# Altium PCB PowerBoard.PcbDoc (part 2 of 2)
Units mm, origin at the board's own origin, x right, y up, seen from the top; angles counter-clockwise.
Board outline 45 x 35 mm, 8 copper layers (Top Layer, Int1 (PGND), int2 (PWR_MOT), int3 (ALIM_MOT), int4 (+3.3VD), int5 (+3.3VA), Int6 (GNDA), Bottom Layer), stack 1.733 mm thick; 96 components, 64 nets, 341 pads, 448 vias.
Unrouted connection lines stored in the file: 117.
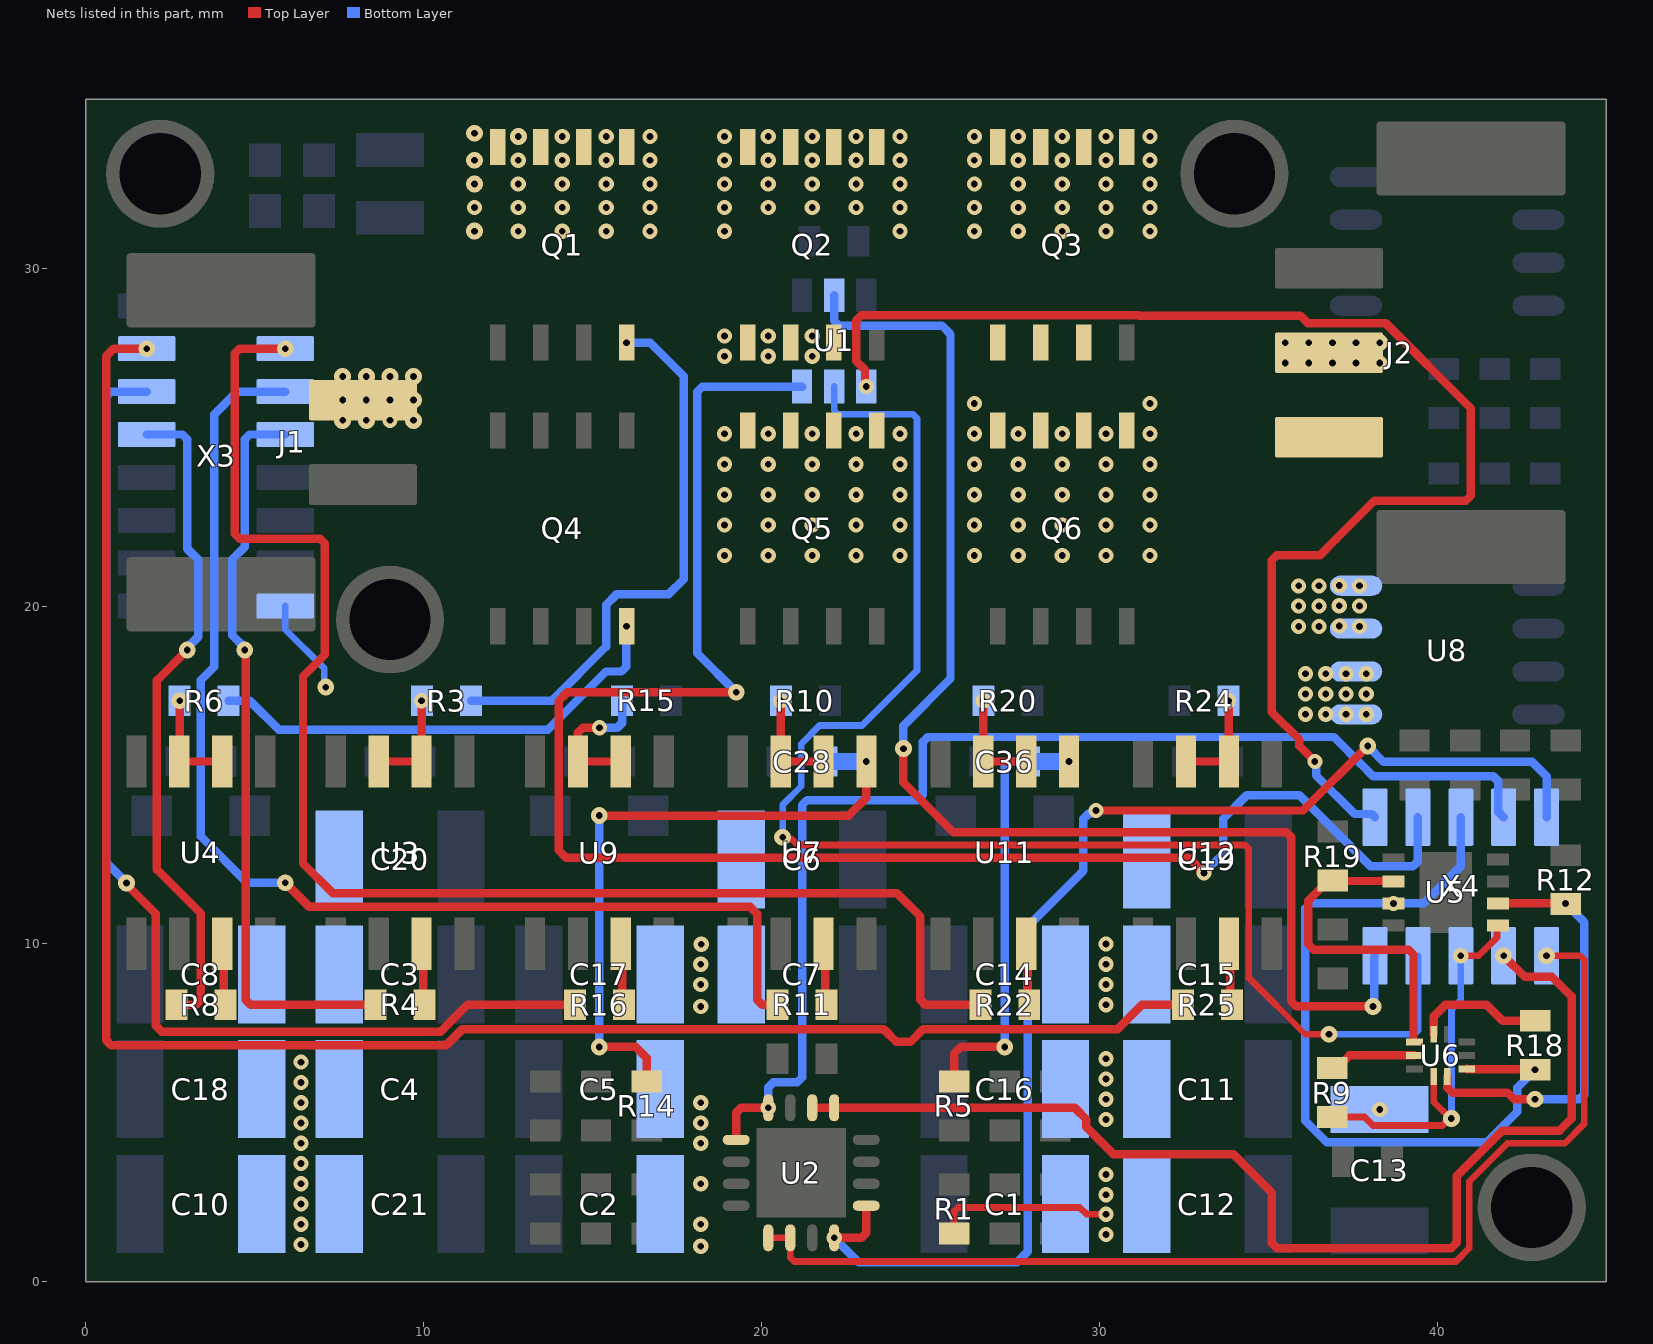
[diagram p8: the nets of this part, all layers, seen from the top]

## Via types
v1: diameter 0.45, hole 0.2, Top Layer to Bottom Layer, 368 vias
v2: diameter 0.5, hole 0.2, Top Layer to Bottom Layer, 80 vias

## Nets (pads, with @x,y where several pads share a name; then routed paths per layer and width w, separated by ;. In a path a pad name is that pad's centre, name@x,y a point inside that pad or via, vN(x,y) a via of type N, cw(c..) or ccw(c..) an arc to the next point about the centre after c; other vN are vias at no path point) (continued)
NetJ2_2: J2.2 U8.3 U8.4
  other v1: 35.9,19.4 36.5,19.4 37.7,19.4 37.1,19.409 35.9,20 36.5,20 37.1,20.009 37.7,20 35.9,20.6 36.5,20.6 37.1,20.609 37.7,20.6 36.2,27.2 38.3,27.2 35.5,27.8
  other v2: 35.5,27.2 36.9,27.2 37.6,27.2 36.2,27.8 36.9,27.8 37.6,27.8 38.3,27.8
NetQ1_4: Q1.4 R3.2 | length 16.6
  Bottom Layer w0.25: R3.2@11.4,17.2 13.8,17.2 15.4,18.8 15.4,20.037 15.713,20.35 17.25,20.35 17.7,20.8 17.7,26.8 16.7,27.8 v1(16,27.8)
NetQ4_4: Q4.4 R6.2 | length 14.1
  Bottom Layer w0.25: R6.2@4.225,17.2 4.85,17.2 5.707,16.343 13.678,16.343 15.4,18.065 15.854,18.065 16,18.211 v1(16,19.404)
NetR3_1: R3.1 U3.6 U3.7 | length 3.7
  Top Layer w0.25: U3.7@8.665,15.875 U3.7@8.665,15.4 U3.6@9.935,15.4 v1(9.935,17.2) 9.897,17.162 v1@9.897,17.107
NetR4_1: R4.1 X3.9 | length 22.1
  Top Layer w0.25: v2(4.7,18.7) 4.725,18.675 4.725,8.346 4.871,8.2 R4.1@8.575,8.2
  Bottom Layer w0.25: v2(4.7,18.7) 4.7,18.768 4.325,19.143 4.325,21.375 4.7,21.75 4.7,24.934 4.846,25.08 X3.9@5.9,25.08
NetR4_2: R4.2 U3.3 | length 1.8
  Top Layer w0.25: U3.3@9.935,10 9.98,9.955 9.98,8.245 R4.2@10.025,8.2
NetR6_1: R6.1 U4.6 U4.7 | length 3.1
  Top Layer w0.25: U4.7@2.765,15.4 U4.6@4.035,15.4 ; U4.7@2.775,15.41 v2(2.775,17.2)
  Top Layer w0.5: U4.7@2.765,15.4 U4.7@2.775,15.41
NetR8_1: R8.1 X3.10 | length 19.8
  Top Layer w0.25: R8.1@2.675,8.2 3.254,8.2 3.4,8.346 3.4,10.9 2.1,12.2 2.1,17.8 v2(3,18.7)
  Bottom Layer w0.25: X3.10@1.8,25.08 2.854,25.08 3,24.934 3,21.7 3.325,21.375 3.325,19.093 3,18.768 v2(3,18.7)
NetR8_2: R8.2 U4.3 | length 1.8
  Top Layer w0.25: U4.3@4.035,10 4.08,9.955 4.08,8.245 R8.2@4.125,8.2
NetR9_1: R9.1 U6.9 | length 2.6
  Top Layer w0.25: R9.1@36.9,6.325 37.025,6.325 37.4,6.7 U6.9@39.325,6.7
NetR9_2: R9.2 U5.1 U6.1 X4.6 | length 11.8
  Top Layer w0.2: R9.2@36.9,4.875 37.853,4.875 38.103,4.625 40.153,4.625 40.356,4.828 v2@40.391,4.828 ; U6.1@39.9,6.075 39.9,5.319 v2@40.391,4.828 ; v2(40.42,4.828) v2@40.391,4.828 ; v1(40.7,9.65) 41.227,9.65 41.769,10.192 41.769,10.513 U5.1@41.806,10.55
  Bottom Layer w0.2: v2(40.42,4.828) 40.425,4.833 40.425,8.064 40.7,8.339 v1(40.7,9.65)
NetR10_1: R10.1 U7.6 U7.7 | length 3.1
  Top Layer w0.25: v1(20.565,17.2) U7.7@20.565,15.4 U7.6@21.835,15.4
NetR11_1: R11.1 X3.11 | length 35.7
  Top Layer w0.25: v2(5.9,11.811) 6.611,11.1 19.659,11.1 19.87,10.889 19.87,8.346 20.016,8.2 R11.1@20.475,8.2
  Bottom Layer w0.25: v2(5.9,11.811) 4.769,11.811 3.4,13.18 3.4,17.811 3.8,18.211 3.8,25.679 4.471,26.35 X3.11@5.9,26.35
NetR11_2: R11.2 U7.3 | length 1.8
  Top Layer w0.25: U7.3@21.835,10 21.88,9.955 21.88,8.245 R11.2@21.925,8.2
NetR12_2: R12.2 U5.2 U6.2 | length 12.5
  Top Layer w0.25: U6.2@40.3,6.075 40.3,5.746 40.446,5.6 42.08,5.6 42.275,5.405 42.895,5.405 v2(42.9,5.4) ; U5.2@41.806,11.2 R12.2@43.781,11.2 ; v2(43.8,11.2) 43.8,11.181 R12.2@43.806,11.175
  Bottom Layer w0.25: v2(42.9,5.4) 44.207,5.4 44.354,5.546 44.354,10.646 v2(43.8,11.2)
NetR15_1: R15.1 U9.6 U9.7 | length 4.2
  Top Layer w0.25: v1(15.2,16.4) 14.711,16.4 14.565,16.254 U9.7@14.565,15.4 U9.6@15.835,15.4
  Bottom Layer w0.25: v1(15.2,16.4) 15.729,16.4 15.875,16.546 R15.1@15.875,17.2
NetR16_1: R16.1 X3.12 | length 33.3
  Top Layer w0.25: v2(1.2,11.8) 1.2,11.759 2.07,10.889 2.07,7.576 2.246,7.4 10.5,7.4 11.3,8.2 R16.1@14.475,8.2
  Bottom Layer w0.25: v2(1.2,11.8) 1.2,11.811 0.6,12.411 0.6,26.204 0.746,26.35 X3.12@1.8,26.35
NetR16_2: R16.2 U9.3 | length 1.8
  Top Layer w0.25: U9.3@15.835,10 15.88,9.955 15.88,8.245 R16.2@15.925,8.2
NetR18_1: R18.1 U6.7 | length 3.9
  Top Layer w0.25: U6.7@39.9,7.325 39.9,7.854 40.246,8.2 41.459,8.2 41.934,7.725 R18.1@42.9,7.725
NetR18_2: R18.2 U5.7 U6.3 X4.5 | length 23.3
  Top Layer w0.25: U6.3@40.875,6.3 40.887,6.287 42.887,6.287 v1(42.9,6.275)
  Bottom Layer w0.25: X4.5@40.7,13.75 40.7,12.3 39.6,11.2 v1(38.706,11.2) 36.246,11.2 36.1,11.054 36.1,4.761 36.736,4.125 41.466,4.125 42.375,5.034 42.375,5.75 v1(42.9,6.275)
NetR19_2: R19.2 U5.6 U6.8 | length 9.9
  Top Layer w0.25: U5.6@38.706,11.85 38.693,11.863 36.918,11.863 R19.2@36.906,11.875 36.781,11.875 36.181,11.275 36.181,9.993 36.342,9.832 39.154,9.832 39.3,9.686 U6.8@39.3,7.125
NetR20_1: R20.1 U11.6 U11.7 | length 3.1
  Top Layer w0.25: v1(26.565,17.2) U11.7@26.565,15.4 U11.6@27.835,15.4
NetR22_1: R22.1 X3.13 | length 42.6
  Top Layer w0.25: v2(5.9,27.62) 4.546,27.62 4.4,27.474 4.4,22.146 4.546,22 6.929,22 7.075,21.854 7.075,18.565 6.425,17.915 6.425,12.386 7.311,11.5 24.007,11.5 24.7,10.807 24.7,8.593 24.7,8.346 24.846,8.2 R22.1@26.475,8.2
NetR22_2: R22.2 U11.3 | length 1.8
  Top Layer w0.25: U11.3@27.835,10 27.88,9.955 27.88,8.245 R22.2@27.925,8.2
NetR24_1: R24.1 U12.6 U12.7 | length 3.1
  Top Layer w0.25: U12.7@32.565,15.4 U12.6@33.835,15.4 33.83,15.405 33.83,17.195 v1(33.825,17.2)
NetR25_1: R25.1 X3.14 | length 54.3
  Top Layer w0.25: v2(1.8,27.62) 0.82,27.62 0.6,27.4 0.6,7.146 0.746,7 10.666,7 11.141,7.475 23.618,7.475 23.993,7.1 24.407,7.1 24.782,7.475 30.538,7.475 31.263,8.2 R25.1@32.475,8.2
NetR25_2: R25.2 U12.3 | length 1.8
  Top Layer w0.25: U12.3@33.835,10 33.88,9.955 33.88,8.245 R25.2@33.925,8.2
NetU1_2: U1.2 X4.10 | length 39.2
  Top Layer w0.25: v2(24.2,15.781) 24.2,14.782 25.682,13.3 31.502,13.3 31.506,13.303 35.534,13.303 35.68,13.157 35.68,8.296 35.826,8.15 v2(38.103,8.15)
  Bottom Layer w0.25: U1.2@22.15,29.2 22.15,28.451 22.296,28.304 25.339,28.304 25.593,28.05 25.593,17.853 24.2,16.46 v2(24.2,15.781) ; v2(38.103,8.15) 38.132,8.178 38.132,9.622 X4.10@38.16,9.65
NetU1_4: U1.4 X4.9 | length 39.9
  Top Layer w0.25: v1(23.1,26.5) 23.062,26.538 23.062,26.997 22.8,27.258 22.8,28.454 22.959,28.613 31.148,28.613 31.16,28.6 35.952,28.6 36.177,28.375 38.479,28.375 41,25.854 41,23.271 40.854,23.125 38.151,23.125 37.01,21.985 36.526,21.5 35.246,21.5 35.1,21.354 35.1,16.869 35.921,16.048 35.921,15.859 v1(36.38,15.4)
  Bottom Layer w0.25: v1(36.38,15.4) 36.419,15.362 36.419,14.989 37.561,13.846 38.064,13.846 X4.9@38.16,13.75
NetU1_5: U1.5 X4.8 | length 43.8
  Top Layer w0.2: v2(20.625,13.157) 20.682,13.1 20.907,13.1 21.082,12.925 31.658,12.925 31.661,12.928 34.308,12.928 34.425,12.811 34.425,8.995 36.095,7.325 v2(36.8,7.325)
  Bottom Layer w0.2: v2(20.625,13.157) 20.625,14.118 21.175,14.668 21.175,15.923 21.716,16.464 22.975,16.464 24.6,18.089 24.6,25.561 24.483,25.679 22.267,25.679 22.15,25.796 U1.5@22.15,26.5 ; v2(36.8,7.325) 39.313,7.325 39.43,7.442 X4.8@39.43,9.65
NetU1_6: U1.6 X4.7 | length 51.8
  Top Layer w0.25: v2(19.25,17.45) 14.246,17.45 13.99,17.194 13.99,12.775 14.215,12.55 32.65,12.55 v1(33.1,12.1)
  Bottom Layer w0.25: v2(19.25,17.45) 18.101,18.599 18.101,26.354 18.248,26.5 U1.6@21.2,26.5 ; v1(33.1,12.1) 33.662,12.662 33.662,13.701 34.363,14.401 35.921,14.401 38.023,12.3 39.284,12.3 39.43,12.446 X4.7@39.43,13.75
NetU2_1: U2.1 U2.16 X4.1 | length 37.7
  Top Layer w0.25: v1(22.15,1.3) 22.954,1.3 23.1,1.446 U2.1@23.1,2.25 ; v1(29.9,13.95) 36.033,13.95 v2(37.944,15.862)
  Bottom Layer w0.25: v1(22.15,1.3) 22.875,0.575 27.562,0.575 27.88,0.893 27.88,10.519 29.525,12.164 29.525,13.704 29.671,13.85 29.746,13.85 29.846,13.95 v1(29.9,13.95) ; v2(37.944,15.862) 38.417,15.388 42.815,15.388 43.24,14.963 X4.1@43.24,13.75
NetU2_5: U2.5 U2.6 X4.4 | length 34.1
  Top Layer w0.25: U2.6@21.5,5.15 U2.5@22.15,5.15 29.271,5.15 29.618,4.804 29.618,4.571 30.414,3.775 33.967,3.775 35.105,2.637 35.105,1.143 35.251,0.996 40.42,0.996 40.575,1.152 40.575,3.122 41.928,4.475 43.625,4.475 43.979,4.828 43.979,8.446 43.401,9.024 42.596,9.024 v2(41.97,9.65)
NetU2_8: U2.8 U2.9 X4.3 | length 35.6
  Top Layer w0.25: U2.9@19.25,4.2 19.25,5.004 19.396,5.15 v1(20.2,5.15)
  Bottom Layer w0.25: v1(20.2,5.15) 20.2,5.754 20.346,5.9 21.054,5.9 21.2,6.046 21.2,14.109 21.346,14.255 24.616,14.255 24.775,14.414 24.775,15.979 24.921,16.125 26.856,16.125 36.942,16.125 37.419,15.648 37.419,15.644 37.727,15.337 37.731,15.337 38.104,14.963 41.662,14.963 41.808,14.817 41.808,13.912 X4.3@41.97,13.75
NetU2_13: U2.13 U2.14 X4.2 | length 33.6
  Top Layer w0.2: U2.13@20.2,1.3 U2.14@20.85,1.3 20.85,0.717 20.967,0.6 40.554,0.6 40.95,0.996 40.95,2.966 42.084,4.1 43.781,4.1 44.354,4.673 44.354,9.533 44.236,9.65 v2(43.24,9.65)
"Phase V": C28.1 Q2.1 Q2.2 Q2.3 Q5.5 Q5.6 Q5.7 Q5.8 R14.1 U7.5 U8.1 U8.2 | length 19.5
  Top Layer w0.25: v2(15.196,6.95) 16.275,6.95 16.6,6.625 R14.1@16.6,5.875 ; v2(15.196,13.8) 22.575,13.8 23.1,14.325 v1(23.1,15.4)
  Bottom Layer w0.25: v2(15.196,6.95) v2(15.196,13.8)
  Bottom Layer w0.5: C28.1@21.925,15.4 v1(23.1,15.4)
  other v1: 36.1,16.8 36.7,16.8 37.3,16.8 37.9,16.8 36.1,17.4 36.7,17.4 37.3,17.4 37.9,17.4 36.1,18 36.7,18 37.3,18 37.9,18 18.9,21.5 20.2,21.5 21.5,21.5 22.8,21.5 24.1,21.5 18.9,22.4 20.2,22.4 21.5,22.4 22.8,22.4 24.1,22.4 18.9,23.3 20.2,23.3 21.5,23.3 22.8,23.3 24.1,23.3 18.9,24.2 20.2,24.2 21.5,24.2 22.8,24.2 24.1,24.2 18.9,25.1 20.2,25.1 21.5,25.1 22.8,25.1 24.1,25.1 18.9,27.4 20.2,27.4 21.5,27.4 18.9,28 20.2,28 21.5,28
"Phase W": C36.1 J2.3 Q3.1 Q3.2 Q3.3 Q6.5 Q6.6 Q6.7 Q6.8 R5.1 U11.5 | length 13.6
  Top Layer w0.25: R5.1@25.7,6.025 25.7,6.754 25.896,6.95 v2(27.2,6.95)
  Top Layer w0.5: J2.3@35.8,25 J2.3@36.8,25
  Bottom Layer w0.25: v2(27.2,6.95) 27.2,15.254 27.346,15.4 C36.1@27.925,15.4
  Bottom Layer w0.5: C36.1@27.925,15.4 v1(29.1,15.4)
  other v1: 26.3,21.5 27.6,21.5 28.9,21.5 30.2,21.5 31.5,21.5 26.3,22.4 27.6,22.4 28.9,22.4 30.2,22.4 31.5,22.4 26.3,23.3 27.6,23.3 28.9,23.3 30.2,23.3 31.5,23.3 26.3,24.2 27.6,24.2 28.9,24.2 30.2,24.2 31.5,24.2 26.3,25.1 27.6,25.1 28.9,25.1 30.2,25.1 31.5,25.1 26.3,26 31.5,26
VP: C1.2 C2.2 C3.2 C4.2 C5.2 C6.2 C7.2 C8.2 C10.2 C11.2 C12.2 C13.2 C14.2 C15.2 C16.2 C17.2 C18.2 C19.2 C20.2 C21.2 J1.2 Q1.5 Q1.6 Q1.7 Q1.8 Q2.5 Q2.6 Q2.7 Q2.8 Q3.5 Q3.6 Q3.7 Q3.8 R1.1 X3.1 | length 8.1
  Top Layer w0.2: R1.1@25.7,1.475 25.7,2.083 25.817,2.2 29.418,2.2 29.618,2 v1(30.2,2)
  Bottom Layer w0.2: X3.1@5.9,20 5.9,19.306 7.056,18.15 7.056,17.644 v2(7.1,17.6)
  other v1: 18.2,1.05 6.362,1.1 30.2,1.4 6.362,1.7 18.2,1.7 6.362,2.3 30.2,2.575 6.362,2.9 18.2,2.9 30.2,3.175 6.362,3.5 6.362,4.1 18.2,4.1 6.362,4.7 18.2,4.7 30.2,4.8 38.3,5.1 6.362,5.3 18.2,5.3 30.2,5.4 6.362,5.9 30.2,6 6.362,6.5 30.2,6.6 18.2,8.15 30.2,8.2 18.2,8.8 30.2,8.8 18.2,9.4 30.2,9.4 18.212,9.992 30.2,10 9,25.5 8.3,26.1 12.8,31.1 14.1,31.1 15.4,31.1 16.7,31.1 18.9,31.1 24.1,31.1 26.3,31.1 27.6,31.1 28.9,31.1 30.2,31.1 31.5,31.1 11.5,31.8 12.8,31.8 14.1,31.8 15.4,31.8 16.7,31.8 18.9,31.8 20.2,31.8 21.5,31.8 22.8,31.8 24.1,31.8 26.3,31.8 27.6,31.8 28.9,31.8 30.2,31.8 31.5,31.8 12.8,32.5 14.1,32.5 15.4,32.5 16.7,32.5 18.9,32.5 20.2,32.5 21.5,32.5 22.8,32.5 24.1,32.5 26.3,32.5 27.6,32.5 28.9,32.5 30.2,32.5 31.5,32.5 12.8,33.2 14.1,33.2 15.4,33.2 16.7,33.2 18.9,33.2 20.2,33.2 21.5,33.2 22.8,33.2 24.1,33.2 26.3,33.2 27.6,33.2 28.9,33.2 30.2,33.2 31.5,33.2 14.1,33.9 15.4,33.9 16.7,33.9 18.9,33.9 20.2,33.9 21.5,33.9 22.8,33.9 24.1,33.9 26.3,33.9 27.6,33.9 28.9,33.9 30.2,33.9 31.5,33.9
  other v2: 7.6,25.5 8.3,25.5 9.7,25.5 7.6,26.1 9,26.1 9.7,26.1 7.6,26.8 8.3,26.8 9,26.8 9.7,26.8 11.5,31.1 11.5,32.5 11.5,33.2 12.8,33.9 11.5,34
pads on no net: J1.4 J1.5 J2.4 J2.5 U2.7 U2.15 U3.1 U3.4 U4.1 U4.4 U5.9 U7.1 U7.4 U9.1 U9.4 U11.1 U11.4 U12.1 U12.4 X3.16

## Polygon pours and split planes (outlines as drawn)
DGND on Top Layer "DGND_L01_P014" (solid, pour order 14): 18.513,20.429 22.609,20.429 22.609,18.479 18.513,18.479
DGND on Top Layer "DGND_L01_P015" (solid, pour order 15): 25.8,20.35 29.9,20.35 29.9,18.4 25.8,18.4
DGND on Top Layer "DGND_L01_P013" (solid, pour order 13): 11.075,20.35 15.196,20.35 15.196,18.4 11.075,18.4
VP on Top Layer "VP_L01_P006" (solid, pour order 6): 13,34.5 32,34.5 32,29 13,29
"Phase V" on Top Layer "PHASE_V_L01_P003" (solid, pour order 3): 22.5,28.575 22.5,26 24.7,26 24.7,20.775 18.5,20.775 18.5,28.575
NetC24_1 on Top Layer "NETC24_1_L01_P002" (solid, pour order 2): 15.475,28.575 15.475,26.775 17.275,26.775 17.275,20.775 11.075,20.775 11.075,28.575
"Phase W" on Top Layer "PHASE_W_L01_P000" (solid, pour order 0): 38.65,26.2 38.65,23.6 32,23.6 32,20.8 25.8,20.8 25.8,28.6 30.2,28.6 30.2,26.2
AGND on Bottom Layer "AGND_L08_P029" (solid, pour order 29): 41.1,26 43.8,26 43.8,23.5 41.1,23.5
DGND on Bottom Layer "DGND_L08_P027" (solid, pour order 27): 40.8,26 40.8,23.5 39.6,23.5 39.6,26
VP on Bottom Layer "VP_L08_P018" (solid, pour order 18): 18.5,14.2 18.5,10.831 16.125,10.831 16.125,10.8 16.125,0.623 16.148,0.6 18.6,0.6 18.6,7.4 20.2,7.4 20.2,10.8 20.169,10.831 20.169,14.2
DGND on Bottom Layer "DGND_L08_P020" (solid, pour order 20): 26.238,6.625 27.8,6.625 27.8,5.425 26.238,5.425 26.238,2.2 27.8,2.2 27.8,0.623 23.793,0.623 23.793,7.4 22.163,7.4 22.163,14.194 24.6,14.201 24.6,10.8 26.238,10.8
DGND on Bottom Layer "DGND_L08_P022" (solid, pour order 22): 36,0.623 36.023,0.6 36.588,0.6 36.588,0.623 39.9,0.623 39.9,3 36,3 36,14.2 33.4,14.2 33.4,0.623
NetJ2_2 on Bottom Layer "NETJ2_2_L08_P025" (solid, pour order 25): 38.5,21.1 35.1,21.1 35.1,18.9 38.5,18.9
"Phase V" on Bottom Layer "PHASE_V_L08_P024" (solid, pour order 24): 38.5,18.5 35.7,18.5 35.7,16.4 38.5,16.4
VP on Bottom Layer "VP_L08_P021" (solid, pour order 21): 32.3,14.2 30.162,14.2 30.162,10.8 28.125,10.8 28.125,0.6 32.3,0.6
DGND on Bottom Layer "DGND_L08_P019" (solid, pour order 19): 10.225,14.2 12.262,14.2 12.262,10.8 14.3,10.8 14.3,0.6 10.225,0.6
DGND on Bottom Layer "DGND_L08_P017" (solid, pour order 17): 3.177,0.6 3.2,0.623 3.2,6.9 2.5,6.9 2.5,10.8 0.7,10.8 0.7,0.6
VP on Bottom Layer "VP_L08_P016" (solid, pour order 16): 8.4,10.8 8.3,10.9 8.3,14.2 6.362,14.2 6.362,10.8 4.325,10.8 4.325,0.6 8.4,0.6
NetC24_1 on Bottom Layer "NETC24_1_L08_P012" (solid, pour order 12): 35.8,31 38.8,31 38.8,31.9 38,31.9 38,33.4 36.64,33.4 35.8,32.014
NetJ2_1 on Bottom Layer "NETJ2_1_L08_P011" (solid, pour order 11): 36.4,28.4 38.8,28.4 38.8,30.8 36.4,30.8 36.4,29.2
no net on int3 (ALIM_MOT) (split plane): 38.671,28.53 36.529,28.53 36.529,30.471 38.671,30.471
"Phase W" on int3 (ALIM_MOT) (split plane): 31.87,20.729 25.83,20.729 25.83,26.571 31.87,26.571
DGND on int3 (ALIM_MOT) (split plane): 44.49,0.51 40.549,0.51 40.549,6.625 40.539,6.675 40.511,6.717 40.469,6.745 40.42,6.755 32.694,6.755 32.694,15.571 38.8,15.571 38.85,15.58 38.892,15.608 38.92,15.65 38.93,15.7 38.93,18.7 38.929,18.7 38.929,28.4 38.93,28.4 38.93,30.6 38.93,33.4 38.92,33.45 38.892,33.492 38.85,33.52 38.8,33.53 36.929,33.53 36.929,34.49 44.49,34.49
NetJ2_2 on int3 (ALIM_MOT) (split plane): 38.671,18.83 34.929,18.83 34.929,28.271 38.671,28.271
"Phase V" on int3 (ALIM_MOT) (split plane): 34.67,28.346 34.67,21.2 34.67,18.7 34.68,18.65 34.708,18.608 34.75,18.58 34.8,18.571 38.671,18.571 38.671,15.83 32.129,15.83 32.129,26.7 32.12,26.75 32.092,26.792 32.05,26.82 32,26.829 25.7,26.829 25.65,26.82 25.608,26.792 25.58,26.75 25.571,26.7 25.571,20.729 17.929,20.729 17.929,28.471 34.546,28.471
NetC24_1 on int3 (ALIM_MOT) (split plane): 38.671,30.73 36.4,30.73 36.35,30.72 36.308,30.692 36.28,30.65 36.27,30.6 36.27,28.53 34.854,28.53 34.692,28.692 34.65,28.72 34.6,28.73 17.8,28.73 17.75,28.72 17.708,28.692 17.68,28.65 17.671,28.6 17.671,20.729 10.929,20.729 10.929,30.471 34,30.471 34.05,30.48 34.092,30.508 36.854,33.271 38.671,33.271
VP on int3 (ALIM_MOT) (split plane): 36.67,33.454 33.946,30.73 10.8,30.73 10.75,30.72 10.708,30.692 10.68,30.65 10.671,30.6 10.671,20.6 10.68,20.55 10.708,20.508 10.75,20.48 10.8,20.471 31.87,20.471 31.87,15.7 31.88,15.65 31.908,15.608 31.95,15.58 32,15.571 32.435,15.571 32.435,6.625 32.445,6.576 32.473,6.533 32.515,6.505 32.565,6.496 40.29,6.496 40.29,0.51 0.51,0.51 0.51,12.573 0.55,12.58 0.592,12.608 0.62,12.65 0.63,12.7 0.62,12.75 0.592,12.792 0.55,12.82 0.51,12.827 0.51,34.49 36.67,34.49
NetJ2_2 on int2 (PWR_MOT) (split plane): 38.671,26 38.671,23.4 38.671,20.7 38.671,18.83 34.929,18.83 34.929,28.271 38.671,28.271
NetJ2_1 on int2 (PWR_MOT) (split plane): 38.671,28.53 36.529,28.53 36.529,30.471 38.671,30.471
"Phase V" on int2 (PWR_MOT) (split plane): 34.67,28.346 34.67,18.7 34.68,18.65 34.708,18.608 34.75,18.58 34.8,18.571 38.671,18.571 38.671,15.83 32.63,15.829 32.63,20.6 32.63,26.7 32.62,26.75 32.592,26.792 32.55,26.82 32.5,26.829 25.8,26.829 25.75,26.82 25.708,26.792 25.68,26.75 25.671,26.7 25.671,20.6 25.671,16.929 23.6,16.929 23.55,16.92 23.508,16.892 23.48,16.85 23.471,16.8 23.471,14.529 22.629,14.529 22.629,17.871 24.5,17.871 24.55,17.88 24.592,17.908 24.62,17.95 24.629,18 24.629,20.6 24.62,20.65 24.592,20.692 24.55,20.72 24.5,20.729 18.53,20.729 18.53,28.471 34.546,28.471
"Phase W" on int2 (PWR_MOT) (split plane): 32.371,20.6 32.371,16.929 29.6,16.929 29.55,16.92 29.508,16.892 29.48,16.85 29.471,16.8 29.471,14.529 28.729,14.529 28.729,17.871 31.8,17.871 31.85,17.88 31.892,17.908 31.92,17.95 31.929,18 31.929,20.6 31.92,20.65 31.892,20.692 31.85,20.72 31.8,20.729 25.929,20.729 25.929,26.571 32.371,26.571
NetC24_1 on int2 (PWR_MOT) (split plane): 38.671,30.73 36.4,30.73 36.35,30.72 36.308,30.692 36.28,30.65 36.27,30.6 36.27,28.53 34.854,28.53 34.692,28.692 34.65,28.72 34.6,28.73 18.4,28.73 18.35,28.72 18.308,28.692 18.28,28.65 18.271,28.6 18.271,20.6 18.271,16.929 11.7,16.929 11.65,16.92 11.608,16.892 11.58,16.85 11.571,16.8 11.571,14.529 10.829,14.529 10.829,17.936 17,17.936 17.05,17.945 17.092,17.973 17.12,18.015 17.129,18.065 17.129,20.6 17.12,20.65 17.092,20.692 17.05,20.72 17,20.729 11.029,20.729 11.029,30.471 34,30.471 34.05,30.48 34.092,30.508 36.854,33.271 38.671,33.271
no net on int2 (PWR_MOT) (split plane): 38.671,33.53 36.8,33.53 36.75,33.52 36.708,33.492 33.946,30.73 10.9,30.73 10.85,30.72 10.808,30.692 10.78,30.65 10.771,30.6 10.771,20.6 10.78,20.55 10.808,20.508 10.85,20.48 10.9,20.471 16.87,20.471 16.87,18.195 6.492,18.195 6.492,20 6.482,20.05 6.454,20.092 6.412,20.12 6.362,20.129 0.51,20.129 0.51,34.49 38.671,34.49
DGND on int2 (PWR_MOT) (split plane): 44.49,0.51 0.51,0.51 0.51,12.573 0.55,12.58 0.592,12.608 0.654,12.671 32.5,12.671 32.55,12.68 32.592,12.708 32.62,12.75 32.63,12.8 32.63,15.57 38.8,15.571 38.85,15.58 38.892,15.608 38.92,15.65 38.93,15.7 38.93,20.7 38.93,23.4 38.93,26 38.93,28.4 38.93,30.6 38.93,33.4 38.93,34.49 44.49,34.49
+12V on int2 (PWR_MOT) (split plane): 31.67,18.129 28.6,18.129 28.55,18.12 28.508,18.092 28.48,18.05 28.471,18 28.471,14.4 28.48,14.35 28.508,14.308 28.55,14.28 28.6,14.271 29.6,14.271 29.65,14.28 29.692,14.308 29.72,14.35 29.729,14.4 29.729,16.671 32.371,16.671 32.371,15.7 32.371,12.929 0.629,12.929 0.629,19.871 6.233,19.871 6.233,18.065 6.243,18.015 6.271,17.973 6.313,17.945 6.362,17.936 10.571,17.936 10.571,14.4 10.58,14.35 10.608,14.308 10.65,14.28 10.7,14.271 11.7,14.271 11.75,14.28 11.792,14.308 11.82,14.35 11.829,14.4 11.829,16.671 18.4,16.671 18.45,16.68 18.492,16.708 18.52,16.75 18.53,16.8 18.53,20.471 24.37,20.471 24.37,18.129 22.5,18.129 22.45,18.12 22.408,18.092 22.38,18.05 22.371,18 22.371,14.4 22.38,14.35 22.408,14.308 22.45,14.28 22.5,14.271 23.6,14.271 23.65,14.28 23.692,14.308 23.72,14.35 23.729,14.4 23.729,16.671 25.8,16.671 25.85,16.68 25.892,16.708 25.92,16.75 25.929,16.8 25.929,20.471 31.67,20.471
DGND on Int1 (PGND) (split plane): 44.37,0.629 0.63,0.629 0.63,34.37 44.37,34.37
+3.3VD on int4 (+3.3VD) (split plane): 44.49,0.51 0.51,0.51 0.51,34.49 44.49,34.49
+3.3VA on int5 (+3.3VA) (split plane): 44.49,0.51 0.51,0.51 0.51,34.49 44.49,34.49
AGND on Int6 (GNDA) (split plane): 44.471,0.754 44.346,0.629 0.63,0.629 0.63,34.37 44.471,34.37

## Other copper
Int1 (PGND) (plane layer: these items are gaps in the copper):
  lines w0.254: 0.5,0.5 44.5,0.5 44.5,34.5 0.5,34.5 0.5,0.5
int2 (PWR_MOT) (plane layer: these items are gaps in the copper):
  lines w0.254: 32.5,16.8 29.6,16.8 29.6,14.4 28.6,14.4 28.6,18 31.8,18 31.8,20.6 25.8,20.6 ; 38.8,20.7 38.8,15.7 32.5,15.7 ; 38.8,35 38.8,33.4 ; 0.5,20 0.5,12.7 0.6,12.8 32.5,12.8 ; 0.5,20 0.5,20 ; 0.5,20 6.362,20 6.362,18.065 10.7,18.065 ; 10.7,18.065 17,18.065 17,20.6 10.9,20.6 10.9,30.6 12.8,30.6 34,30.6 36.8,33.4 38.8,33.4 ; 10.7,18.065 10.7,14.4 11.7,14.4 11.7,16.8 18.4,16.8 18.4,20.6 ; 18.4,20.6 18.4,28.6 19.2,28.6 34.6,28.6 34.8,28.4 ; 18.4,20.6 24.5,20.6 24.5,18 22.5,18 22.5,14.4 23.6,14.4 23.6,16.8 25.8,16.8 25.8,20.6 ; 25.8,20.6 25.8,26.7 27.075,26.7 30.625,26.7 32.5,26.7 32.5,20.6 32.5,15.7 ; 32.5,12.8 32.5,15.7 ; 32.5,12.8 32.5,12.8 ; 34.8,28.4 36.4,28.4 36.4,30.6 38.8,30.6 ; 34.8,28.4 38.8,28.4 ; 34.8,28.4 34.8,18.7 38.8,18.7 38.8,23.4 38.8,26 38.8,28.4 ; 38.8,28.4 38.8,30.6 ; 38.8,30.6 38.8,33.4
int3 (ALIM_MOT) (plane layer: these items are gaps in the copper):
  lines w0.254: 0.5,12.7 0.5,12.7 ; 32,20.6 25.7,20.6 ; 32.565,15.7 32.565,6.625 40.42,6.625 40.42,0 ; 34.8,21.2 34.8,28.4 ; 36.8,35 36.8,33.4 ; 38.195,18.7 38.8,18.7 ; 17.8,20.6 25.7,20.6 ; 17.8,20.6 10.8,20.6 10.8,30.6 34,30.6 36.8,33.4 ; 17.8,20.6 17.8,28.6 34.6,28.6 34.8,28.4 ; 25.7,20.6 25.7,26.7 32,26.7 32,15.7 38.8,15.7 38.8,18.7 ; 34.8,28.4 38.8,28.4 ; 34.8,28.4 34.8,18.7 38.8,18.7 ; 34.8,28.4 36.4,28.4 ; 36.4,28.4 38.8,28.4 ; 36.4,28.4 36.4,30.6 38.8,30.6 ; 36.8,33.4 36.9,33.4 38.8,33.4 38.8,30.6 ; 38.8,18.7 38.8,28.4 ; 38.8,28.4 38.8,30.6
Int6 (GNDA) (plane layer: these items are gaps in the copper):
  lines w0.254: 0.5,0.5 0.5,34.5 44.6,34.5 44.6,34.4 44.6,0.7 44.4,0.5 0.5,0.5

## Silkscreen, mask and mechanical layers (free items; w line width, h text height)
Board:
  the board outline again, w1
Dimensions:
  lines w1: 0,0 0,35 45,35 45,0 0.1,0
Fab Notes:
  drawing of 400 lines, arcs and shapes, not listed
  text "Layer" at -9.635,107.85 h1.5
  text "Name" at -3.359,107.85 h1.5
  text "Material" at 9.791,107.85 h1.5
  text "Thickness" at 18.251,107.85 h1.5
  text "Constant" at 27.209,107.85 h1.5
  text "Board Layer Stack" at 35.5,107.85 h1.5
  text "Top Overlay" at -3.359,104.85 h1.5
  text "Top Solder" at -3.359,101.85 h1.5
  text "SM-001" at 9.791,101.85 h1.5
  text "0.025mm" at 18.251,101.85 h1.5
  text "4" at 27.209,101.85 h1.5
  text "1" at -9.635,98.85 h1.5
  text "Top Layer" at -3.359,98.85 h1.5
  text "CF-004" at 9.791,98.85 h1.5
  text "0.035mm" at 18.251,98.85 h1.5
  text "Dielectric 1" at -3.359,95.85 h1.5
  text "PP-006" at 9.791,95.85 h1.5
  text "0.071mm" at 18.251,95.85 h1.5
  text "4.1" at 27.209,95.85 h1.5
  text "Dielectric 2" at -3.359,92.85 h1.5
  text "PP-016" at 9.791,92.85 h1.5
  text "0.117mm" at 18.251,92.85 h1.5
  text "4.4" at 27.209,92.85 h1.5
  text "2" at -9.636,89.85 h1.5
  text "Int1 (PGND)" at -3.359,89.85 h1.5
  text "CF-004" at 9.791,89.85 h1.5
  text "0.035mm" at 18.251,89.85 h1.5
  text "Dielectric 3" at -3.359,86.85 h1.5
  text "Core-024" at 9.791,86.85 h1.5
  text "0.203mm" at 18.251,86.85 h1.5
  text "4.6" at 27.209,86.85 h1.5
  text "3" at -9.635,83.85 h1.5
  text "int2 (PWR_MOT)" at -3.359,83.85 h1.5
  text "CF-004" at 9.791,83.85 h1.5
  text "0.035mm" at 18.251,83.85 h1.5
  text "Dielectric 4" at -3.359,80.85 h1.5
  text "PP-016" at 9.791,80.85 h1.5
  text "0.117mm" at 18.251,80.85 h1.5
  text "4.4" at 27.209,80.85 h1.5
  text "Dielectric 5" at -3.359,77.85 h1.5
  text "PP-016" at 9.791,77.85 h1.5
  text "0.117mm" at 18.251,77.85 h1.5
  text "4.4" at 27.209,77.85 h1.5
  text "4" at -9.635,74.85 h1.5
  text "int3 (ALIM_MOT)" at -3.359,74.85 h1.5
  text "CF-004" at 9.791,74.85 h1.5
  text "0.035mm" at 18.251,74.85 h1.5
  text "Dielectric 6" at -3.359,71.85 h1.5
  text "Core-024" at 9.791,71.85 h1.5
  text "0.203mm" at 18.251,71.85 h1.5
  text "4.6" at 27.209,71.85 h1.5
  text "5" at -9.635,68.85 h1.5
  text "int4 (+3.3VD)" at -3.359,68.85 h1.5
  text "CF-004" at 9.791,68.85 h1.5
  text "0.035mm" at 18.251,68.85 h1.5
  text "Dielectric 7" at -3.359,65.85 h1.5
  text "PP-016" at 9.791,65.85 h1.5
  text "0.117mm" at 18.251,65.85 h1.5
  text "4.4" at 27.209,65.85 h1.5
  text "Dielectric 8" at -3.359,62.85 h1.5
  text "PP-016" at 9.791,62.85 h1.5
  text "0.117mm" at 18.251,62.85 h1.5
  text "4.4" at 27.209,62.85 h1.5
  text "6" at -9.635,59.85 h1.5
  text "int5 (+3.3VA)" at -3.359,59.85 h1.5
  text "CF-004" at 9.791,59.85 h1.5
  text "0.035mm" at 18.251,59.85 h1.5
  text "Dielectric 9" at -3.359,56.85 h1.5
  text "Core-024" at 9.791,56.85 h1.5
  text "0.203mm" at 18.251,56.85 h1.5
  text "4.6" at 27.209,56.85 h1.5
  text "7" at -9.635,53.85 h1.5
  text "Int6 (GNDA)" at -3.359,53.85 h1.5
  text "CF-004" at 9.791,53.85 h1.5
  text "0.035mm" at 18.251,53.85 h1.5
  text "Dielectric 10" at -3.359,50.85 h1.5
  text "PP-016" at 9.791,50.85 h1.5
  text "0.117mm" at 18.251,50.85 h1.5
  text "4.4" at 27.209,50.85 h1.5
  text "Dielectric 11" at -3.359,47.85 h1.5
  text "PP-006" at 9.791,47.85 h1.5
  text "0.071mm" at 18.251,47.85 h1.5
  text "4.1" at 27.209,47.85 h1.5
  text "8" at -9.635,44.85 h1.5
  text "Bottom Layer" at -3.359,44.85 h1.5
  text "CF-004" at 9.791,44.85 h1.5
  text "0.035mm" at 18.251,44.85 h1.5
  text "Bottom Solder" at -3.359,41.85 h1.5
  text "SM-001" at 9.791,41.85 h1.5
  text "0.025mm" at 18.251,41.85 h1.5
  text "4" at 27.209,41.85 h1.5
  text "Bottom Overlay" at -3.359,38.85 h1.5
Drill Drawing:
  circle w0.254: c2.665,131.407 r0.921
  lines w0.2: 0.1,129.243 169.667,129.243 ; 0.1,137.529 169.667,137.529 ; 10.742,125.1 10.742,141.672 ; 20.551,125.1 20.551,141.672 ; 38.85,125.1 38.85,141.672 ; 47.101,125.1 47.101,141.672 ; 59.113,125.1 59.113,141.672 ; 81.893,125.1 81.893,141.672 ; 91.736,125.1 91.736,141.672 ; 104.593,125.1 104.593,141.672 ; 115.892,125.1 115.892,141.672 ; 128.805,125.1 128.805,141.672 ; 148.884,125.1 148.884,141.672 ; 0.1,125.1 169.667,125.1 169.667,141.672 0.1,141.672 0.1,125.1
  lines w0.254: 1.745,136.47 3.586,136.47 2.665,134.629 1.745,136.47
  text "Symbol" at 2.586,138.772 h2.4
  text "Count" at 11.985,138.772 h2.4
  text "Hole Size" at 21.794,138.772 h2.4
  text "Plated" at 40.093,138.772 h2.4
  text "Hole Type" at 48.344,138.772 h2.4
  text "Drill Layer Pair" at 60.356,138.772 h2.4
  text "Via/Pad" at 83.136,138.772 h2.4
  text "Pad Shape" at 92.978,138.772 h2.4
  text "Template" at 105.836,138.772 h2.4
  text "Description" at 117.135,138.772 h2.4
  text "Hole Tolerance (+)" at 130.048,138.772 h2.4
  text "Hole Tolerance (-)" at 150.127,138.772 h2.4
  text "4" at 11.985,134.629 h2
  text "2.400mm (94.49mil)" at 21.794,134.629 h2
  text "PTH" at 40.093,134.629 h2
  text "Round" at 48.344,134.629 h2
  text "Top Layer - Bottom Layer" at 60.356,134.629 h2
  text "Pad" at 83.136,134.629 h2
  text "Rounded" at 92.978,134.629 h2
  text "c320h240" at 105.836,134.629 h2
  text "448" at 11.985,130.486 h2
  text "0.200mm (7.87mil)" at 21.794,130.486 h2
  text "PTH" at 40.093,130.486 h2
  text "Round" at 48.344,130.486 h2
  text "Top Layer - Bottom Layer" at 60.356,130.486 h2
  text "Via" at 83.136,130.486 h2
  text "Rounded" at 92.978,130.486 h2
  text "(Mixed)" at 105.836,130.486 h2
  text "452 Total" at 11.985,126.343 h2

## Dimensions
0,0 to 45,35 on Dimensions
0,0 to 0,35 on Dimensions

## Text inside footprints (layer, text, board x,y; h text height)
Q1: Top External CAD "Default Padstyle: RX42Y18D0T" at 26.178,21.81 h1.27 r90; Top External CAD "Alt 1 Padstyle: OX60Y90D30P" at 28.083,22.127 h1.27 r90; Top External CAD "Alt 2 Padstyle: OX90Y60D30P" at 29.988,22.127 h1.27 r90; Top External CAD "0.246in/6.248mm" at 5.337,28.319 h0.64 r90; Top External CAD "0.03in/0.762mm" at 9.147,25.734 h0.64 r90; Top External CAD "0.05in/1.27mm" at 13.148,20.629 h0.64 r90; Top External CAD "0.201in/5.105mm" at 14.418,36.644 h0.64 r90; Top External CAD "0.232in/5.893mm" at 22.876,28.319 h0.64 r90; Top External CAD "0.169in/4.293mm" at 20.336,27.036 h0.64 r90
Q2: Top External CAD "Default Padstyle: RX42Y18D0T" at 33.578,21.81 h1.27 r90; Top External CAD "Alt 1 Padstyle: OX60Y90D30P" at 35.483,22.128 h1.27 r90; Top External CAD "Alt 2 Padstyle: OX90Y60D30P" at 37.388,22.128 h1.27 r90; Top External CAD "0.246in/6.248mm" at 12.737,28.319 h0.64 r90; Top External CAD "0.03in/0.762mm" at 16.547,25.734 h0.64 r90; Top External CAD "0.05in/1.27mm" at 20.548,20.629 h0.64 r90; Top External CAD "0.201in/5.105mm" at 21.818,36.644 h0.64 r90; Top External CAD "0.232in/5.893mm" at 30.276,28.319 h0.64 r90; Top External CAD "0.169in/4.293mm" at 27.736,27.036 h0.64 r90
Q3: Top External CAD "Default Padstyle: RX42Y18D0T" at 40.978,21.81 h1.27 r90; Top External CAD "Alt 1 Padstyle: OX60Y90D30P" at 42.883,22.127 h1.27 r90; Top External CAD "Alt 2 Padstyle: OX90Y60D30P" at 44.788,22.127 h1.27 r90; Top External CAD "0.246in/6.248mm" at 20.137,28.319 h0.64 r90; Top External CAD "0.03in/0.762mm" at 23.947,25.734 h0.64 r90; Top External CAD "0.05in/1.27mm" at 27.948,20.629 h0.64 r90; Top External CAD "0.201in/5.105mm" at 29.218,36.644 h0.64 r90; Top External CAD "0.232in/5.893mm" at 37.676,28.319 h0.64 r90; Top External CAD "0.169in/4.293mm" at 35.136,27.036 h0.64 r90
Q4: Top External CAD "0.169in/4.293mm" at 20.336,18.636 h0.64 r90; Top External CAD "0.232in/5.893mm" at 22.876,19.919 h0.64 r90; Top External CAD "0.201in/5.105mm" at 14.418,28.244 h0.64 r90; Top External CAD "0.05in/1.27mm" at 13.148,12.229 h0.64 r90; Top External CAD "0.03in/0.762mm" at 9.147,17.334 h0.64 r90; Top External CAD "0.246in/6.248mm" at 5.337,19.919 h0.64 r90; Top External CAD "Alt 2 Padstyle: OX90Y60D30P" at 29.988,13.728 h1.27 r90; Top External CAD "Alt 1 Padstyle: OX60Y90D30P" at 28.083,13.728 h1.27 r90; Top External CAD "Default Padstyle: RX42Y18D0T" at 26.178,13.41 h1.27 r90
Q5: Top External CAD "Default Padstyle: RX42Y18D0T" at 33.578,13.41 h1.27 r90; Top External CAD "Alt 1 Padstyle: OX60Y90D30P" at 35.483,13.728 h1.27 r90; Top External CAD "Alt 2 Padstyle: OX90Y60D30P" at 37.388,13.728 h1.27 r90; Top External CAD "0.246in/6.248mm" at 12.737,19.919 h0.64 r90; Top External CAD "0.03in/0.762mm" at 16.547,17.334 h0.64 r90; Top External CAD "0.05in/1.27mm" at 20.548,12.229 h0.64 r90; Top External CAD "0.201in/5.105mm" at 21.818,28.244 h0.64 r90; Top External CAD "0.232in/5.893mm" at 30.276,19.919 h0.64 r90; Top External CAD "0.169in/4.293mm" at 27.736,18.636 h0.64 r90
Q6: Top External CAD "Default Padstyle: RX42Y18D0T" at 40.978,13.41 h1.27 r90; Top External CAD "Alt 1 Padstyle: OX60Y90D30P" at 42.883,13.728 h1.27 r90; Top External CAD "Alt 2 Padstyle: OX90Y60D30P" at 44.788,13.728 h1.27 r90; Top External CAD "0.246in/6.248mm" at 20.137,19.919 h0.64 r90; Top External CAD "0.03in/0.762mm" at 23.947,17.334 h0.64 r90; Top External CAD "0.05in/1.27mm" at 27.948,12.229 h0.64 r90; Top External CAD "0.201in/5.105mm" at 29.218,28.244 h0.64 r90; Top External CAD "0.232in/5.893mm" at 37.676,19.919 h0.64 r90; Top External CAD "0.169in/4.293mm" at 35.136,18.636 h0.64 r90
X3: Bottom Overlay "1" at 6.85,19.03 h1.02 r90; Bottom Overlay "2" at 1.85,19.155 h1.02 r90; Bottom Overlay "15" at 6.85,31.305 h1.02 r90; Bottom Overlay "16" at 1.875,31.305 h1.02 r90
X4: Bottom Overlay "2" at 44.705,9.7 h1.02 r180; Bottom Overlay "1" at 44.505,14.7 h1.02 r180; Bottom Overlay "9" at 37.395,14.7 h1.02 r180; Bottom Overlay "10" at 37.395,9.7 h1.02 r180